# EAGLE board AdE9153a_bordfile (EAGLE 9.6.2)
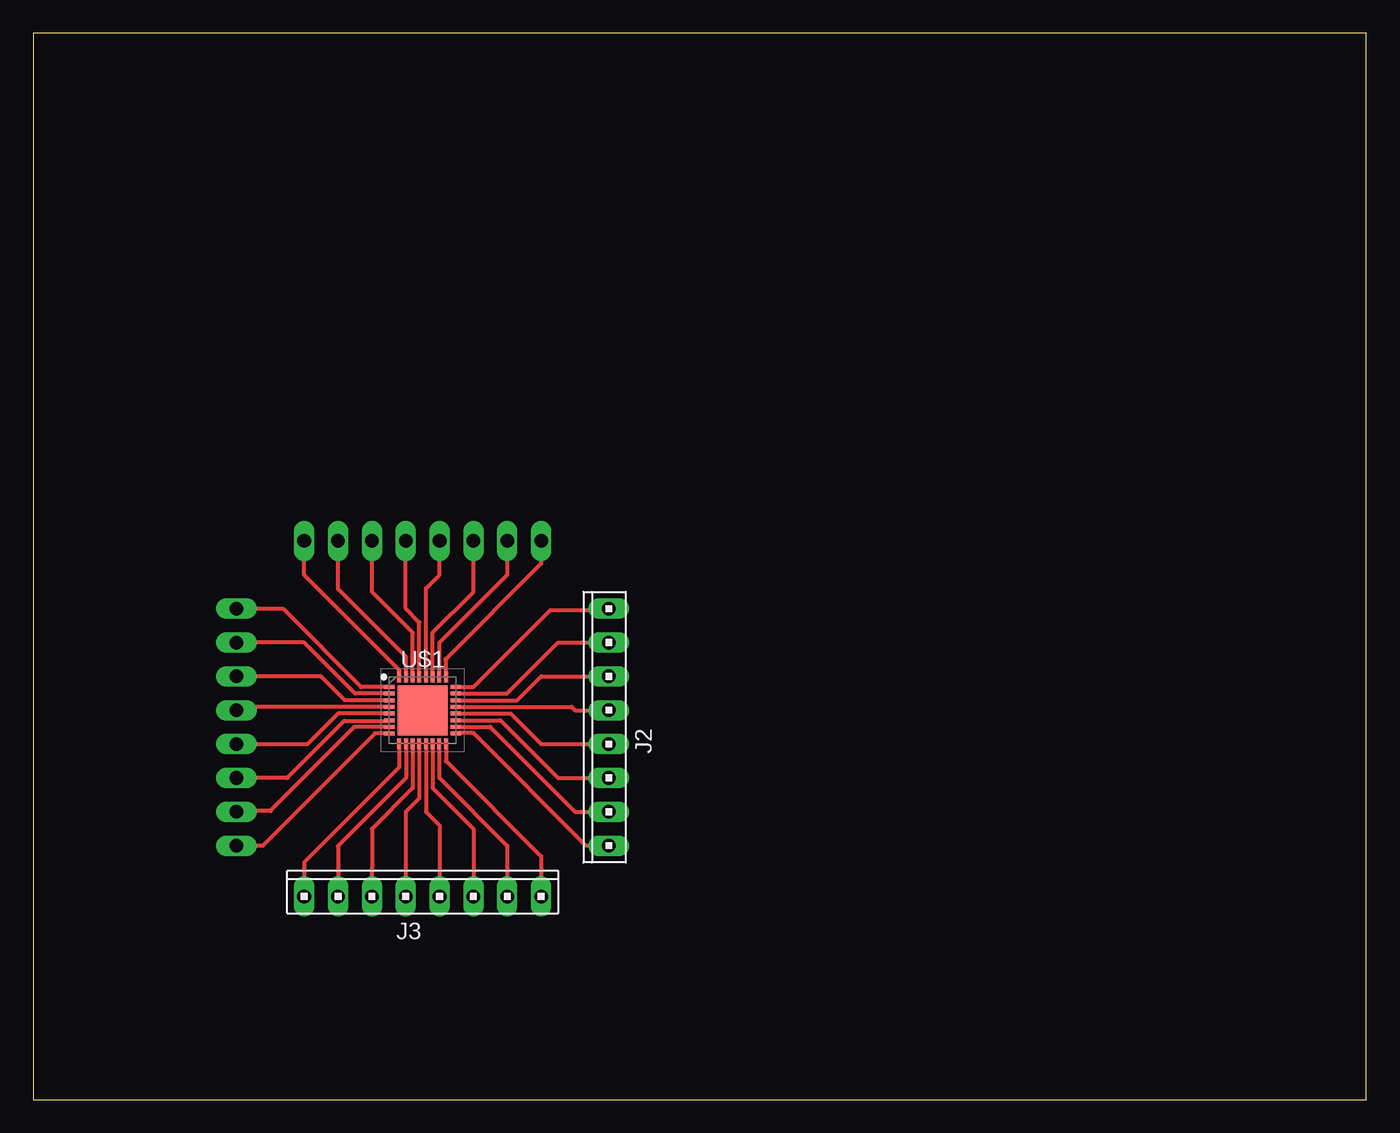
[diagram p0: board, top side]
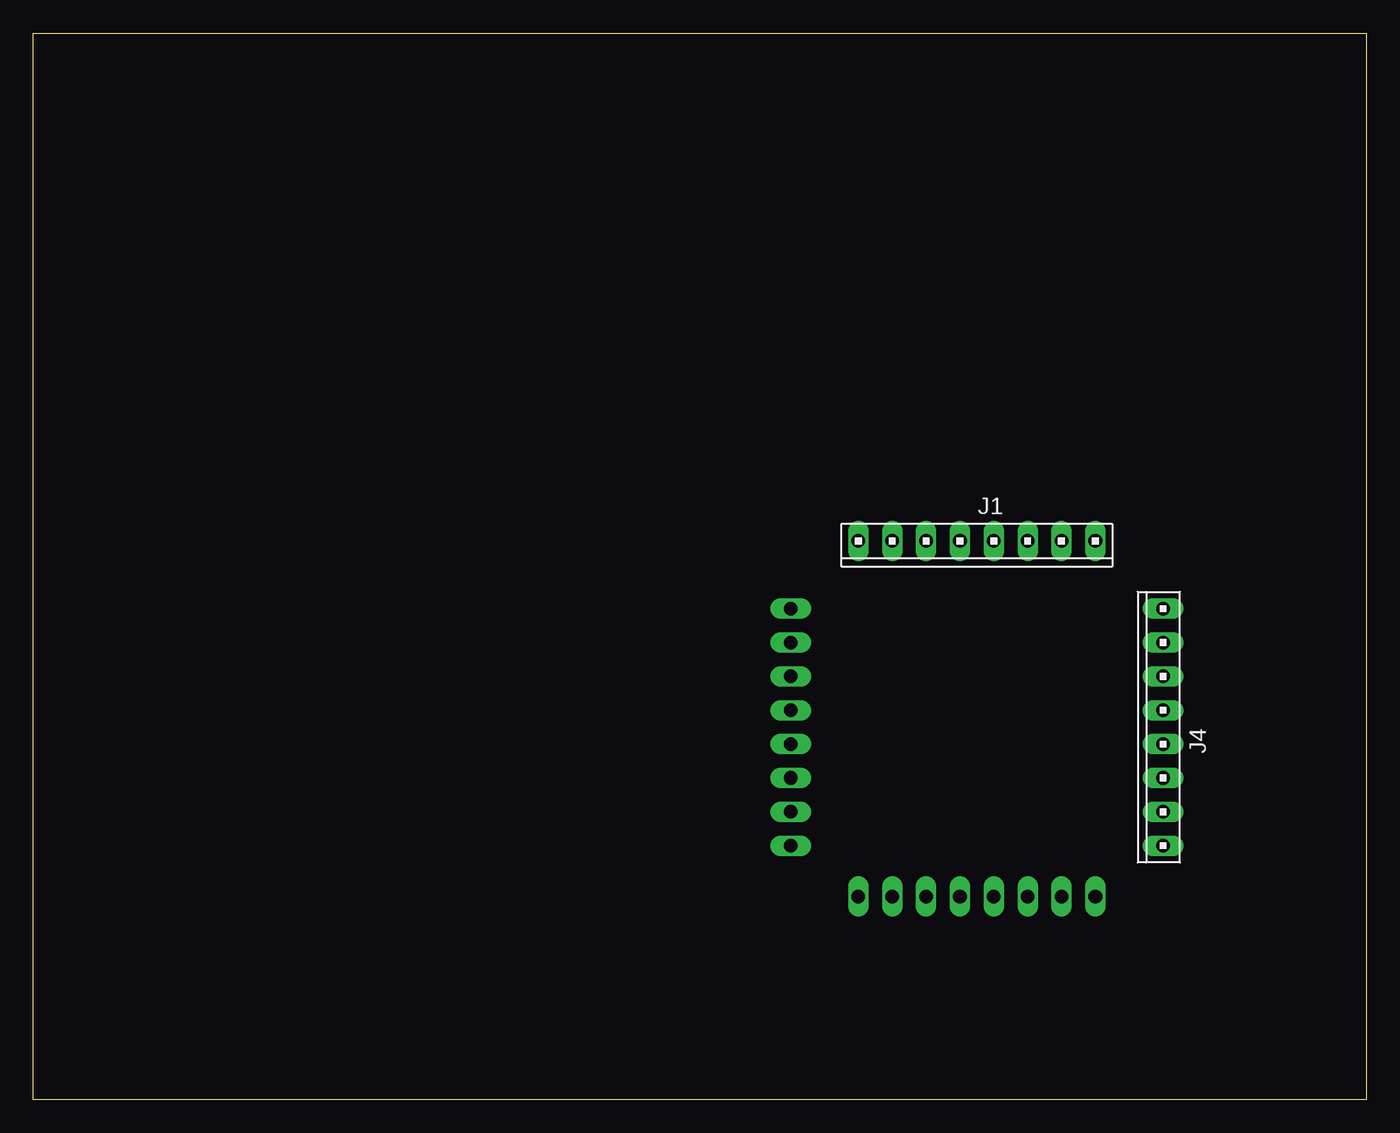
[diagram p1: board, bottom side, seen from below]

Size 100 x 80 mm. Coordinates in mm from the lower left corner, seen from the top.
Outline: 0,0 100,0 100,80 0,80 0,0
Copper layers (1*16): Top 0.035mm / dielectric 1.5mm / Bottom 0.035mm
Design rules "default": minimum track width 6mil, minimum drill 0.35mm, track to track 6mil, track to pad 6mil, pad to pad 6mil, via to via 6mil, smd to smd 6mil, copper to edge 40mil, drill to drill 6mil, minimum pad ring 10mil, minimum via ring 8mil, stop-mask expansion 4mil, vias tented up to drill 0mil, thermal gap 10mil

## Footprints (pad centres in the part's own frame; a part is rotated, then mirrored left to right if it is on the bottom)
10X08MTA = drill 1.016 long: 1 8.89,0; 2 6.35,0; 3 3.81,0; 4 1.27,0; 5 -1.27,0; 6 -3.81,0; 7 -6.35,0; 8 -8.89,0
QFN50P500X500X80-33N = smd 0.8 x 0.3: 1 -2.5,1.75; 2 -2.5,1.25; 3 -2.5,0.75; 4 -2.5,0.25; 5 -2.5,-0.25; 6 -2.5,-0.75; 7 -2.5,-1.25; 8 -2.5,-1.75; 17 2.5,-1.75; 18 2.5,-1.25; 19 2.5,-0.75; 20 2.5,-0.25; 21 2.5,0.25; 22 2.5,0.75; 23 2.5,1.25; 24 2.5,1.75 | smd 0.3 x 0.8: 9 -1.75,-2.5; 10 -1.25,-2.5; 11 -0.75,-2.5; 12 -0.25,-2.5; 13 0.25,-2.5; 14 0.75,-2.5; 15 1.25,-2.5; 16 1.75,-2.5; 25 1.75,2.5; 26 1.25,2.5; 27 0.75,2.5; 28 0.25,2.5; 29 -0.25,2.5; 30 -0.75,2.5; 31 -1.25,2.5; 32 -1.75,2.5 | smd 3.75 x 3.75: 33 0,0

## Placement (x,y rotation side)
J1  [10X08MTA]  29.21,41.91 180 bottom
J2  [10X08MTA]  43.18,27.94 90 top
J3  [10X08MTA]  29.21,15.24 0 top
J4  [10X08MTA]  15.24,27.94 90 bottom
U$1  ADE9153AACPZ  [QFN50P500X500X80-33N]  29.21,29.21 0 top

## Library data of the parts
J1-J4 = con-amp
U$1 = ADE9153AACPZ; AVAILABILITY: In Stock; DESCRIPTION: Energy Metering IC with Autocalibration; MF: Analog Devices; MP: ADE9153AACPZ; PACKAGE: LFCSP -32 Analog Devices; PRICE: None; PURCHASE-URL: https://pricing.snapeda.com/search/part/ADE9153AACPZ/?ref=eda

## Nets
N$1: J1.1 U$1.25
N$2: J1.2 U$1.26
N$3: J1.3 U$1.27
N$4: J1.4 U$1.28
N$5: J1.5 U$1.29
N$6: J1.6 U$1.30
N$7: J1.7 U$1.31
N$8: J1.8 U$1.32
N$9: J2.8 U$1.17
N$10: J2.7 U$1.18
N$11: J2.6 U$1.19
N$12: J2.5 U$1.20
N$13: J2.4 U$1.21
N$14: J2.3 U$1.22
N$15: J2.2 U$1.23
N$16: J2.1 U$1.24
N$17: J3.8 U$1.9
N$18: J3.7 U$1.10
N$19: J3.6 U$1.11
N$20: J3.5 U$1.12
N$21: J3.4 U$1.13
N$22: J3.3 U$1.14
N$23: J3.2 U$1.15
N$24: J3.1 U$1.16
N$25: J4.1 U$1.1
N$26: J4.2 U$1.2
N$27: J4.3 U$1.3
N$28: J4.4 U$1.4
N$29: J4.5 U$1.5
N$30: J4.6 U$1.6
N$31: J4.7 U$1.7
N$32: J4.8 U$1.8

## Tracks (layer width: path | path; a pad name or v marks a point on that pad's centre or on a via)
N$1
  Top 0.305: U$1.25 30.92,31.75 30.92,33.02 38.1,40.2 J1.1
N$2
  Top 0.305: U$1.26 30.46,34.27 35.56,39.37 J1.2
N$3
  Top 0.305: U$1.27 29.96,35.04 33.02,38.1 J1.3
N$4
  Top 0.305: U$1.28 29.46,38.35 30.48,39.37 J1.4
N$5
  Top 0.305: U$1.29 28.96,35.81 27.94,36.83 J1.5
N$6
  Top 0.305: U$1.30 28.46,35.04 25.4,38.1 J1.6
N$7
  Top 0.305: J1.7 22.86,38.31 27.96,33.21 U$1.31
N$8
  Top 0.305: U$1.32 27.5,31.75 | U$1.32 27.5,31.75 | J1.8 20.32,39.37 27.46,32.23 U$1.32
N$9
  Top 0.152: 31.85,27.43 U$1.17 | 43.13,19.05 J2.8
  Top 0.305: U$1.17 31.73,27.48 31.87,27.48 31.9,27.5 33.02,27.5 41.47,19.05 J2.8
N$10
  Top 0.152: 31.85,27.89 U$1.18
  Top 0.305: U$1.18 31.72,27.96 31.74,27.95 31.82,27.96 34.27,27.96 40.64,21.59 J2.7 41.13,21.59
N$11
  Top 0.152: 31.85,28.35 U$1.19 | 43.13,24.23 J2.6
  Top 0.305: U$1.19 35.04,28.46 39.37,24.13 J2.6
N$12
  Top 0.152: 31.85,28.96 U$1.20 | 43.13,26.67 J2.5
  Top 0.305: U$1.20 35.81,28.96 38.1,26.67 J2.5
N$13
  Top 0.152: J2.4 42.98,29.41 | 31.85,29.41 U$1.21
  Top 0.305: J2.4 40.64,29.21 40.39,29.46 U$1.21
N$14
  Top 0.152: 31.85,30.02 U$1.22
  Top 0.305: U$1.22 36.31,29.96 38.1,31.75 J2.3
N$15
  Top 0.152: 43.13,34.29 J2.2
  Top 0.305: U$1.23 35.54,30.46 35.56,30.48 39.37,34.29 J2.2
N$16
  Top 0.152: 42.22,36.73 43.13,36.73
  Top 0.305: U$1.24 33.02,30.96 38.79,36.73 42.22,36.73 | J2.1 43.13,36.78 43.13,36.73
N$17
  Top 0.305: U$1.9 27.46,24.92 20.32,17.78 J3.8
N$18
  Top 0.305: 22.86,16.51 J3.7 22.86,19.03 27.96,24.13 U$1.10
N$19
  Top 0.305: J3.6 25.4,17.37 25.4,20.32 28.46,23.38 28.46,24.13 U$1.11
N$20
  Top 0.152: 28.04,15.24 J3.5
  Top 0.305: U$1.12 28.96,22.61 27.94,21.59 27.94,20.57 J3.5
N$21
  Top 0.305: U$1.13 29.46,21.59 30.48,20.57 J3.4
N$22
  Top 0.152: 32.92,15.24 J3.3
  Top 0.305: U$1.14 29.96,23.38 33.02,20.32 J3.3
N$23
  Top 0.152: 30.48,26.67 U$1.15 | 35.51,15.24 J3.2
  Top 0.305: U$1.15 30.46,24.15 30.48,24.13 35.56,19.05 J3.2
N$24
  Top 0.305: U$1.16 30.96,25.4 38.1,18.26 J3.1
N$25
  Top 0.305: U$1.1 24.61,30.96 | 24.61,30.96 24.59,30.94 | J4.1 18.74,36.83 24.61,30.96
N$26
  Top 0.305: U$1.2 24.15,30.46 20.32,34.29 J4.2
N$27
  Top 0.305: 16.51,31.75 J4.3 21.59,31.75 23.38,29.96 U$1.3
N$28
  Top 0.305: U$1.4 15.49,29.46 J4.4
N$29
  Top 0.305: U$1.5 22.86,28.96 20.57,26.67 J4.5
N$30
  Top 0.305: 15.34,24.23 J4.6 19.05,24.13 23.34,28.42 26.67,28.42 U$1.6
N$31
  Top 0.305: J4.7 15.29,21.64 16.51,21.64 | 17.83,21.64 17.78,21.64 | 17.78,21.64 16.51,21.64 | 16.56,21.59 16.51,21.64 | U$1.7 26.69,27.94 24.08,27.94 17.78,21.64
N$32
  Top 0.305: U$1.8 26.69,27.48 25.64,27.48 17.21,19.05 J4.8